# EAGLE board USB_Micro_Power_to_lab_board_2015-11-16 (EAGLE 7.4.0)
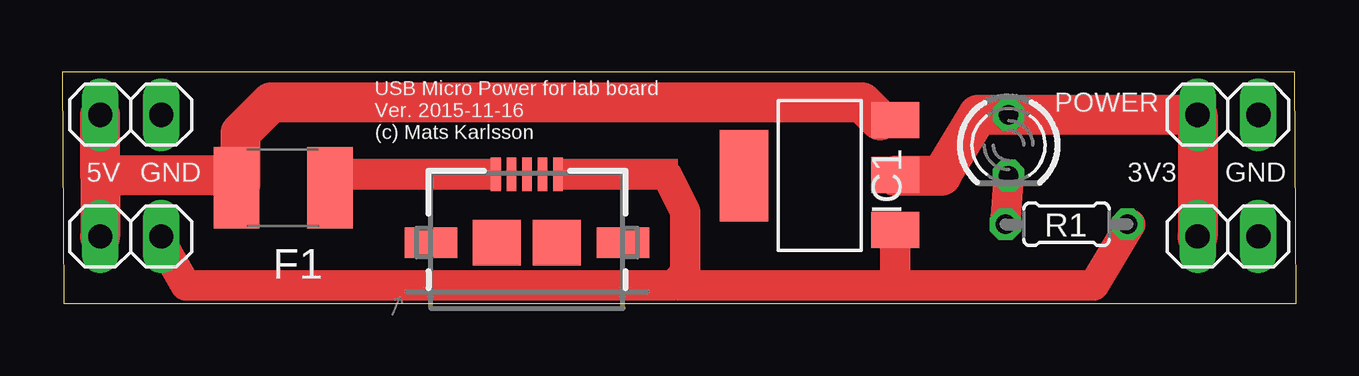
[diagram p0: board, top side]
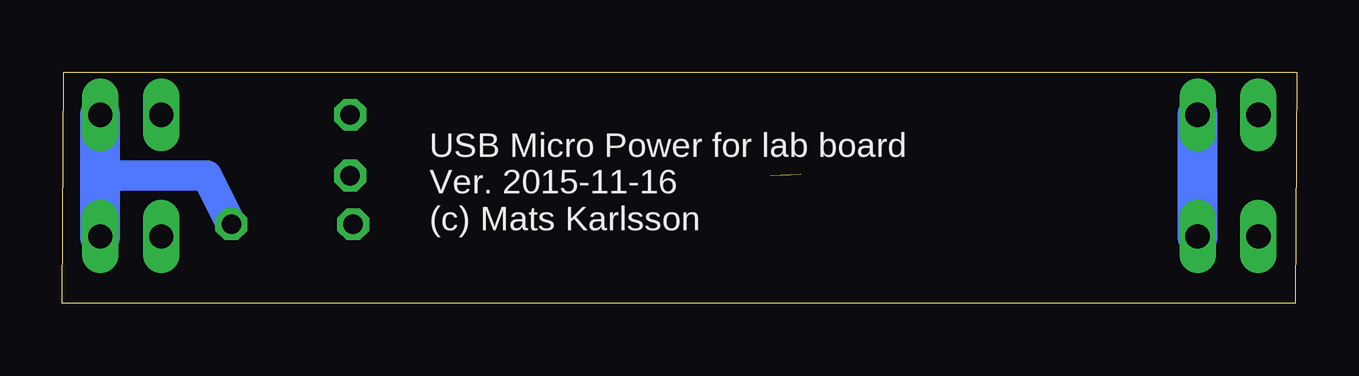
[diagram p1: board, bottom side, seen from below]

Size 51.42 x 9.64 mm. Coordinates in mm from the lower left corner, seen from the top.
Outline: 0.06,0 51.42,0 51.36,9.64 0,9.64 0.06,0
Copper layers (1*16): Top 0.035mm / dielectric 1.5mm / Bottom 0.035mm
Design rules "default": minimum track width 10mil, minimum drill 24mil, track to track 8mil, track to pad 8mil, pad to pad 8mil, via to via 8mil, smd to smd 8mil, copper to edge 40mil, drill to drill 8mil, minimum pad ring 10mil, minimum via ring 8mil, stop-mask expansion 4mil, vias tented up to drill 0mil, thermal gap 10mil

## Footprints (pad centres in the part's own frame; a part is rotated, then mirrored left to right if it is on the bottom)
R1812 = smd 1.9 x 3.4: 1 -1.95,0; 2 1.95,0
SOT223 = smd 1.499 x 2.007: 1 -2.261,-3.15; 2 0.025,-3.15; 3 2.311,-3.15 | smd 3.81 x 2.007: 4 0,3.15
1X02 = drill 1.016 long: 1 -1.27,0; 2 1.27,0
LED3MM = drill 0.813 octagon: A -1.27,0; K 1.27,0
0204/5 = drill 0.813 octagon: 1 -2.54,0; 2 2.54,0
USB-AB-MICRO-SMD_VO2 = smd 1.4 x 0.4: D+ 2.85,0; D- 2.85,0.65; GND 2.85,-1.3; ID 2.85,-0.65; VBUS 2.85,1.3 | smd 1.9 x 2: P$6 0,1.25; P$7 0,-1.25 | smd 1.27 x 2.2: P$8 0,4; P$9 0,-4

## Placement (x,y rotation side)
F1  LITTELFUSE_1812_500MA  [R1812]  9.21,4.83 180 top
IC1  REG1117  [SOT223]  31.56,5.33 90 top
JP1  [1X02]  2.86,7.87 0 top
JP2  [1X02]  48.58,7.87 0 top
JP3  [1X02]  2.86,2.79 0 top
JP4  [1X02]  48.58,2.79 0 top
POWER  [LED3MM]  39.43,6.6 270 top
R1  [0204/5]  41.85,3.3 180 top
U1  [USB-AB-MICRO-SMD_VO2]  19.37,2.54 90 top

## Library data of the parts
F1 = fuses_polyswitch; MPN: 1812L050PR; OC_FARNELL: 1597001; PACKAGE: 1812; SUPPLIER: LITTELFUSE
IC1 = burr-brown; MPN: REG1117; OC_FARNELL: 1097566; OC_NEWARK: 14P6981
JP1-JP4 = pinhead
POWER = led
R1 = resistor
U1 = Testing

## Nets
GND: IC1.1 JP1.2 JP2.2 JP3.2 JP4.2 R1.1 U1.GND
N$1: F1.2 IC1.3 JP1.1 JP3.1
N$2: F1.1 U1.VBUS
N$4: POWER.K R1.2
N$5: IC1.2 JP2.1 JP4.1 POWER.A

## Tracks (layer width: path | path; a pad name or v marks a point on that pad's centre or on a via)
GND  (1 unrouted)
  Top 1.016: 25.21,5.33 21.91,5.33 | IC1.1 34.71,0.86 34.61,0.76 | 44.51,3.3 R1.1 | JP3.2 4.13,2.54
  Top 1.27: 25.59,0.89 25.46,0.76 5.14,0.76 4.13,2.54 | 25.59,0.89 25.97,1.27 25.97,3.81 25.21,5.33 | 34.61,0.76 25.72,0.76 25.59,0.89 | IC1.1 34.71,0.76 42.99,0.76 44.51,3.3
  Bottom 1.27: R1.1 45.4,5.33 49.85,5.33
  Bottom 1.676: JP4.2 49.85,5.33 JP2.2 | JP3.2 JP1.2
N$1
  Top 1.016: IC1.3 34.07,7.64 | 7.43,5 F1.2 7.26,5.25 7.18,5.33
  Top 1.676: 34.07,7.64 33.34,8.38 8.7,8.38 7.43,7.11 7.43,5 | 7.18,5.33 1.59,5.33 | 1.59,5.33 JP1.1 | 1.59,5.33 JP3.1
N$2
  Top 0.406: 11.16,5.14 U1.VBUS 11.16,5.14 | 11.16,5.14 F1.1
N$4
  Top 1.27: R1.2 POWER.K
N$5
  Top 1.016: IC1.2 34.71,5.33
  Top 1.676: JP4.1 JP2.1 POWER.A 38.16,7.87 36.64,5.33 34.71,5.33
(copper drawn outside any net)
  shapes: Top area x2

## Text on the board
tPlace: USB Micro Power for lab board / Ver. 2015-11-16 / (c) Mats Karlsson
bPlace: USB Micro Power for lab board / Ver. 2015-11-16 / (c) Mats Karlsson
tNames: 5V | GND | 3V3 | GND